# Altium PCB DRLPWM.PcbDoc
Units mm, origin at the board's own origin, x right, y up, seen from the top; angles counter-clockwise.
Board outline 152.4 x 101.6 mm, 2 copper layers (Top Layer, Bottom Layer); 30 components, 27 nets, 81 pads, 0 vias.
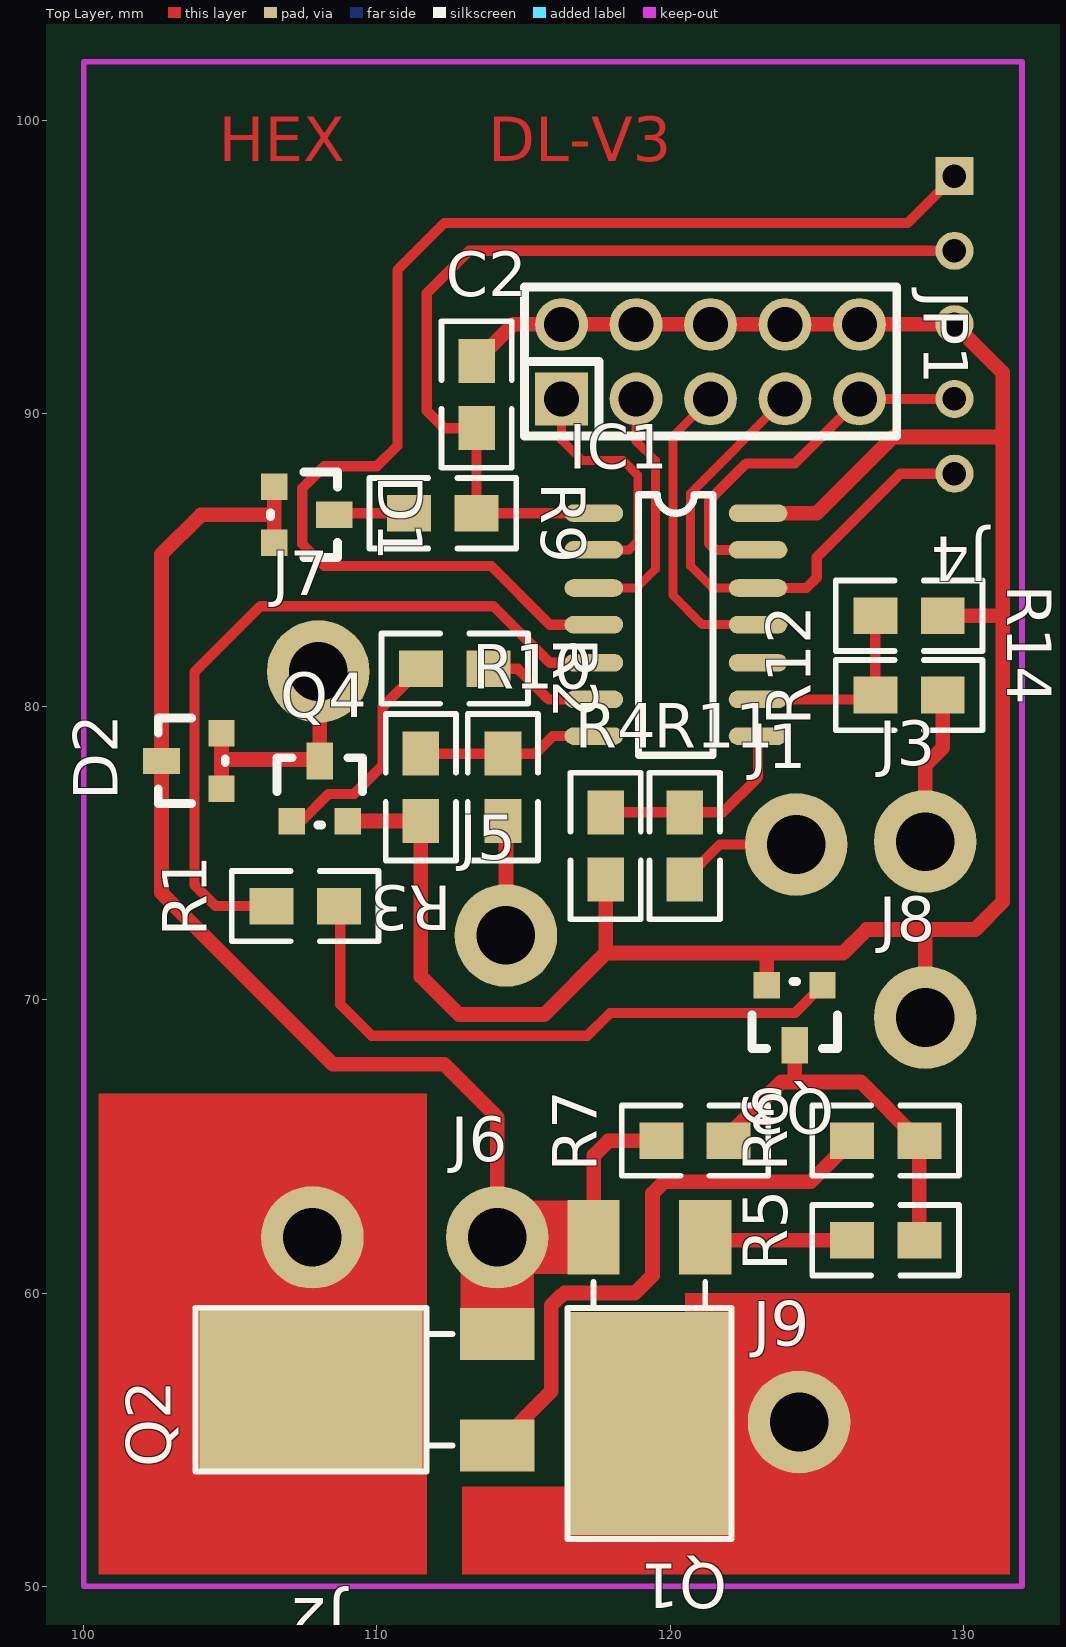
[diagram p0: Top Layer view]
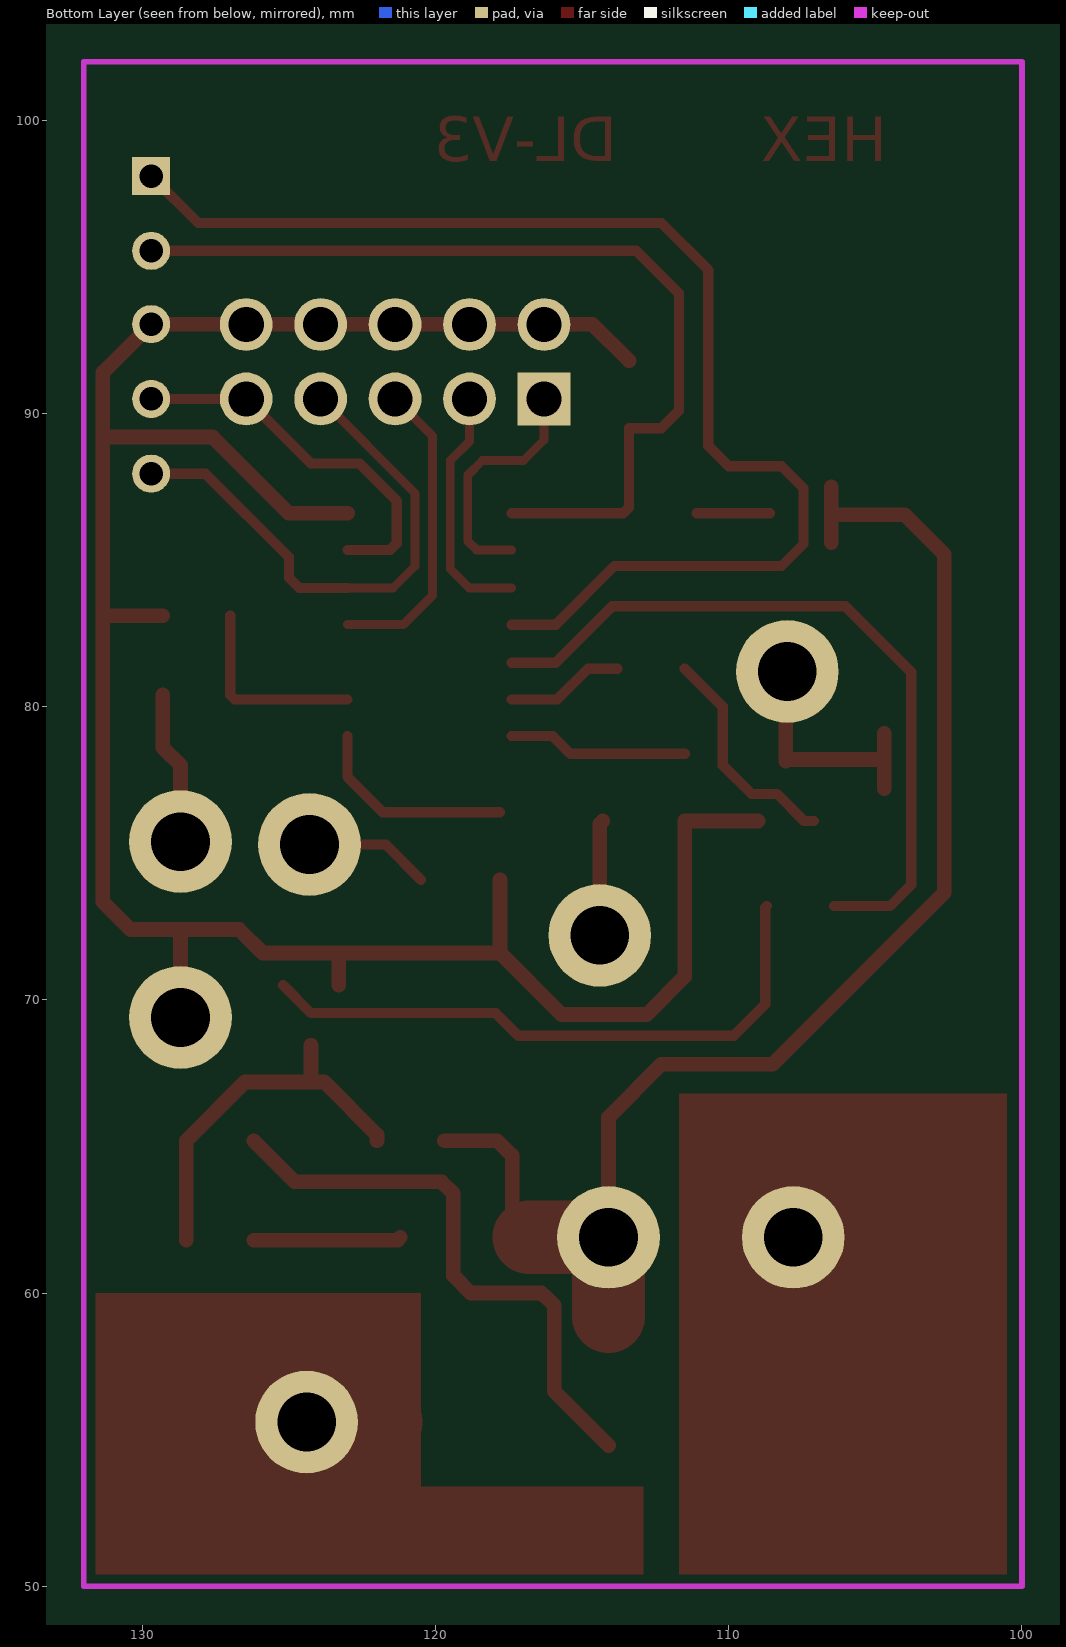
[diagram p1: Bottom Layer view, seen from below]

## Layer stack, top to bottom
Top Layer: signal copper 0.0356
Dielectric: dielectric 0.32, FR-4, Dk 4.8
Bottom Layer: signal copper 0.0356

## Board outline
25.4,25.4 177.8,25.4 177.8,127 25.4,127

## Design rules (kind name [scope] priority, off if disabled: settings)
Clearance [All] p1: gap=0.3
ComponentClearance [All] p1 off: gap=0 collisioncheckmode=3 verticalgap=0.254 showdistances=FALSE
PolygonConnect [All] p1: connectstyle=Relief reliefconductorwidth=0.254 reliefentries=4 polygonreliefangle="90 Angle"
RoutingVias [All] p1: holewidth=0.711 width=1.27 viastyle="Through Hole" minholewidth=0.711 minwidth=1.27 maxholewidth=0.711 maxwidth=1.27
SilkscreenOverComponentPads [All] p1: minsilkscreentomaskgap=0.254
SolderMaskExpansion [All] p1: expansion=0.102
Width [All] p1: maxlimit=5 minlimit=0.25 preferedwidth=0.25
26 further rules are at their usual default settings.

## Components (designator, comment, footprint, x,y, rotation, side; value= is the part's Value field where it differs from the comment)
C2 "22uF" 0805 113.4,89.5 r90 top
D1 "BAV70" SOT-23 106.5,87.5 r270 top
D2 "BAV70" SOT-23 104.7,77.2 r90 top
IC1 "PIC16HV610" SO-14 117.4,86.6 r0 top
J1 "CON1" "SIP1 - WIRE" 124.3,75.3 r0 top
J2 "CON1" "SIP1 - WIRE" 107.8,61.9 r270 top
J3 "CON1" "SIP1 - WIRE" 128.7,75.4 r0 top
J4 "CON5" "SIP5 - PGM" 129.7,98.1 r270 top
J5 "CON1" "SIP1 - WIRE" 114.4,72.2 r0 top
J6 "CON1" "SIP1 - WIRE" 114.1,61.9 r0 top
J7 "CON1" "SIP1 - WIRE" 108,81.2 r0 top
J8 "CON1" "SIP1 - WIRE" 128.7,69.4 r0 top
J9 "CON1" "SIP1 - WIRE" 124.4,55.6 r0 top
JP1 "HEADER 5X2" IDC10 116.3,90.5 r0 top
Q1 "AP9561" D-Pack 121.2,61.9 r270 top
Q2 "AP9561" D-Pack 114.1,54.8 r180 top
Q3 "BC817" SOT-23 125.2,70.5 r180 top
Q4 "BC817" SOT-23 107.1,76.1 r0 top
R1 "2,4k" 0805 108.7,73.2 r180 top
R2 "2,4k" 0805 111.5,81.3 r0 top
R3 "N/A" 0805 111.5,78.4 r270 top
R4 "10k" 0805 117.8,74.1 r90 top
R5 "100R" 0805 128.5,61.8 r180 top
R6 "100R" 0805 128.5,65.2 r180 top
R7 "820" 0805 122,65.2 r180 top
R9 "1k" 0805 111.1,86.6 r0 top
R10 "N/A" 0805 114.3,76.1 r90 top
R11 "20k" 0805 120.5,74.1 r90 top
R12 "20k" 0805 129.3,80.4 r180 top
R14 "10k" 0805 127,83.1 r0 top

## Footprints (in the part's own frame and the unit in brackets; to place one, negate y for a bottom-side part, rotate by r counter-clockwise, add the part's x,y. Pads: shape width x height; smd on the part's side, far side on the other; paste and mask are expansions set on the pad)
0805 [mm]
  rect 1.5x1.25 smd: 1(0,0) 2(2.3,0)
  silkscreen extent -1.35,-1.2 3.65,1.2
D-Pack [mil]
  rect 100x70 smd: 1(0,0) 3(0,-150)
  rect 300x220 smd: 2(250,-75)
  silkscreen extent 60,-185 405,35
IDC10 [mm]
  rect 1.8x1.8 hole 1.2: 1(0,0)
  round 1.8 hole 1.2: 2(0,2.54) 3(2.54,0) 4(2.54,2.54) 5(5.08,0) 6(5.08,2.54) 7(7.62,0) 8(7.62,2.54) 9(10.16,0) 10(10.16,2.54)
  silkscreen extent -1.27,-1.27 11.43,3.81
"SIP1 - WIRE" [mm]
  round 3.5 hole 2: 1(0,0)
"SIP5 - PGM" [mm]
  rect 1.3x1.3 hole 0.8: 1(0,0)
  round 1.3 hole 0.8: 2(2.55,0) 3(5.05,0) 4(7.6,0) 5(10.15,0)
SO-14 [mm]
  oval 2x0.6 smd: 1(0,0) 2(0,-1.25) 3(0,-2.55) 4(0,-3.8) 5(0,-5.1) 6(0,-6.35) 7(0,-7.6) 8(5.6,-7.6) 9(5.6,-6.35) 10(5.6,-5.1) 11(5.6,-3.8) 12(5.6,-2.55) 13(5.6,-1.25) 14(5.6,0)
  silkscreen extent 1.52,-8.25 4.06,0.64
SOT-23 [mm]
  rect 0.9x0.9 smd: 1(0,0) 3(1.9,0)
  rect 0.9x1.25 smd: 2(0.95,2.05)
  silkscreen extent -0.51,-0.13 2.41,2.16

## Part data
C2: library part CAP
D1 D2: library part "DUAL DIODE BAV70"
J1 J2 J3 J4 J5 J6 J7 J8 J9: "Connector"
Q1 Q2: library part "MOSFET P"
Q3 Q4: library part NPN1, "NPN Transistor"
R1 R2 R3 R4 R5 R6 R7 R9 R10 R11 R12 R14: library part RES2

## Nets (pads, with @x,y where several pads share a name; then routed paths per layer and width w, separated by ;. In a path a pad name is that pad's centre, name@x,y a point inside that pad or via, vN(x,y) a via of type N, cw(c..) or ccw(c..) an arc to the next point about the centre after c; other vN are vias at no path point)
+5V: C2.1 IC1.1 J4.2 R9.2 | length 31.3
  Top Layer w0.35: IC1.1 113.6,86.6 113.4,86.8 C2.1 112.3,89.5 111.7,90.1 111.7,94.1 113.15,95.55 J4.2
+12V: D1.1 D1.3 D2.2 J6.1 Q1.3 Q2.3 R7.2 | length 47.3
  Top Layer w0.5: D1.3 106.5,86.55 ; D1.1 106.5,86.55 ; J6.1 114.1,66 112.3,67.8 108.5,67.8 102.65,73.65 D2.2 102.65,85.2 104,86.55 106.5,86.55 ; Q1.3 117.39,64.69 117.9,65.2 R7.2
  Top Layer w2.5: Q2.3@114.1,59.2 J6.1 Q1.3@116.8,61.9
ACC: J3.1 R12.1 | length 5.2
  Top Layer w0.5: J3.1 128.7,78 129.3,78.6 R12.1
EXT: J5.1 R10.1 | length 3.9
  Top Layer w0.5: R10.1 114.4,76 J5.1
GND: C2.2 IC1.14 J4.3 J8.1 JP1.2 JP1.4 JP1.6 JP1.8 JP1.10 Q3.3 Q4.3 R3.2 R4.1 R14.2 | length 85.1
  Top Layer w0.5: Q4.3 R3.2 111.5,70.8 112.8,69.5 115.7,69.5 117.8,71.6 ; C2.2 114.65,93.05 J4.3 131.35,91.4 131.35,89.2 ; R4.1 117.8,71.6 ; IC1.14 125,86.6 127.6,89.2 131.35,89.2 ; Q3.3 123.3,71.6 ; J8.1 128.7,72.4 ; R14.2 131.35,83.1 ; 117.8,71.6 125.9,71.6 126.7,72.4 128.7,72.4 ; 128.7,72.4 130.4,72.4 131.35,73.35 131.35,83.1 ; 131.35,83.1 131.35,89.2
HIB1: J2.1 Q2.2 | length 2.7
  Top Layer w2.5: Q2.2@107.8,59.2 J2.1
HIB2: J9.1 Q1.2 | length 2.7
  Top Layer w2.5: Q1.2@121.7,55.6 J9.1
J6: IC1.11 JP1.5 | length 10.5
  Top Layer w0.3: JP1.5 120.1,89.22 120.1,83.8 121.1,82.8 IC1.11
J7: IC1.10
NetD1_2: D1.2 R9.1 | length 2.5
  Top Layer w0.35: D1.2@108.6,86.6 R9.1
NetIC1_2: IC1.2 JP1.1 | length 8.4
  Top Layer w0.3: JP1.1 116.3,89.1 117,88.4 118.4,88.4 118.9,87.9 118.9,85.65 118.6,85.35 IC1.2
NetIC1_3: IC1.3 JP1.3 | length 8.4
  Top Layer w0.3: IC1.3 118.85,84.05 119.5,84.7 119.5,88.4 118.84,89.06 JP1.3
NetIC1_5: IC1.5 R1.2 | length 25.5
  Top Layer w0.35: R1.2 104.5,73.2 103.775,73.925 103.775,81.175 106.025,83.425 113.975,83.425 115.9,81.5 IC1.5
NetIC1_6: IC1.6 R2.2 | length 4
  Top Layer w0.35: R2.2 114.8,81.3 115.85,80.25 IC1.6
NetIC1_7: IC1.7 R3.1 R10.2 | length 6.1
  Top Layer w0.35: R3.1 R10.2 115.4,78.4 116,79 IC1.7
NetIC1_8: IC1.8 R4.2 R11.2 | length 7.1
  Top Layer w0.35: R4.2 R11.2 121.8,76.4 123,77.6 IC1.8
NetIC1_9: IC1.9 R12.2 R14.1 | length 6.8
  Top Layer w0.35: IC1.9 126.85,80.25 R12.2 R14.1
NetQ1_1: Q1.1 R5.2 | length 5
  Top Layer w0.5: Q1.1 121.3,61.8 R5.2
NetQ2_1: Q2.1 R6.2 | length 19.8
  Top Layer w0.5: Q2.1 115.951,56.651 115.951,59.588 116.273,59.91 116.31,59.91 116.4,60 118.8,60 119.4,60.6 119.4,63.4 119.8,63.8 124.8,63.8 R6.2
NetQ3_1: Q3.1 R1.1 | length 21
  Top Layer w0.35: R1.1 108.75,73.15 108.75,69.85 109.825,68.775 117.175,68.775 117.95,69.55 124.25,69.55 Q3.1
NetQ3_2: Q3.2 R5.1 R6.1 R7.1 | length 12.9
  Top Layer w0.5: R7.1 122,65.4 123.8,67.2 126.5,67.2 R6.1 R5.1 ; 124.25,67.25 Q3.2
NetQ4_1: Q4.1 R2.1 | length 7.7
  Top Layer w0.35: Q4.1 107.428,76.1 108.353,77.025 109.225,77.025 110.2,78 110.2,80 R2.1
OR: D2.1 D2.3 J7.1 Q4.2 | length 8.3
  Top Layer w0.5: D2.1 104.7,78.2 ; D2.3 104.7,78.2 ; J7.1 108.05,81.15 Q4.2 108,78.2 104.7,78.2
PCLK: IC1.12 J4.5 JP1.7 | length 18.4
  Top Layer w0.3: IC1.12 121.45,84.05 120.7,84.8 120.7,87.28 JP1.7
  Top Layer w0.35: IC1.12 124.65,84.05 125,84.4 125,85.1 127.85,87.95 J4.5
PDAT: IC1.13 J4.4 JP1.9 | length 13
  Top Layer w0.35: IC1.13 121.55,85.35 121.325,85.575 121.325,87.021 122.604,88.3 124.26,88.3 JP1.9 J4.4
TAIL: J1.1 R11.1 | length 4.3
  Top Layer w0.35: R11.1 121.7,75.3 J1.1
VPP: IC1.4 J4.1 | length 43.2
  Top Layer w0.35: IC1.4 115.9,82.8 113.9,84.8 108.2,84.8 107.45,85.55 107.45,87.45 108.2,88.2 110,88.2 110.7,88.9 110.7,94.9 112.3,96.5 128.1,96.5 J4.1

## Keep-outs
Keep-Out Layer:
  lines w0.2: 100,50 100,102 132,102 132,50 100,50

## Other copper
Top Layer:
  rectangle net HIB1: 100.5,50.4 111.7,66.8
  rectangle net HIB2: 112.9,50.4 122.8,53.4
  rectangle net HIB2: 120.5,50.4 131.6,60
  text "HEX" at 104.6,98.6 h1.52
  text "DL-V3" at 113.8,98.6 h1.52